# EAGLE board PCB-BI8-2x5C3_V2 (EAGLE 7.1.0)
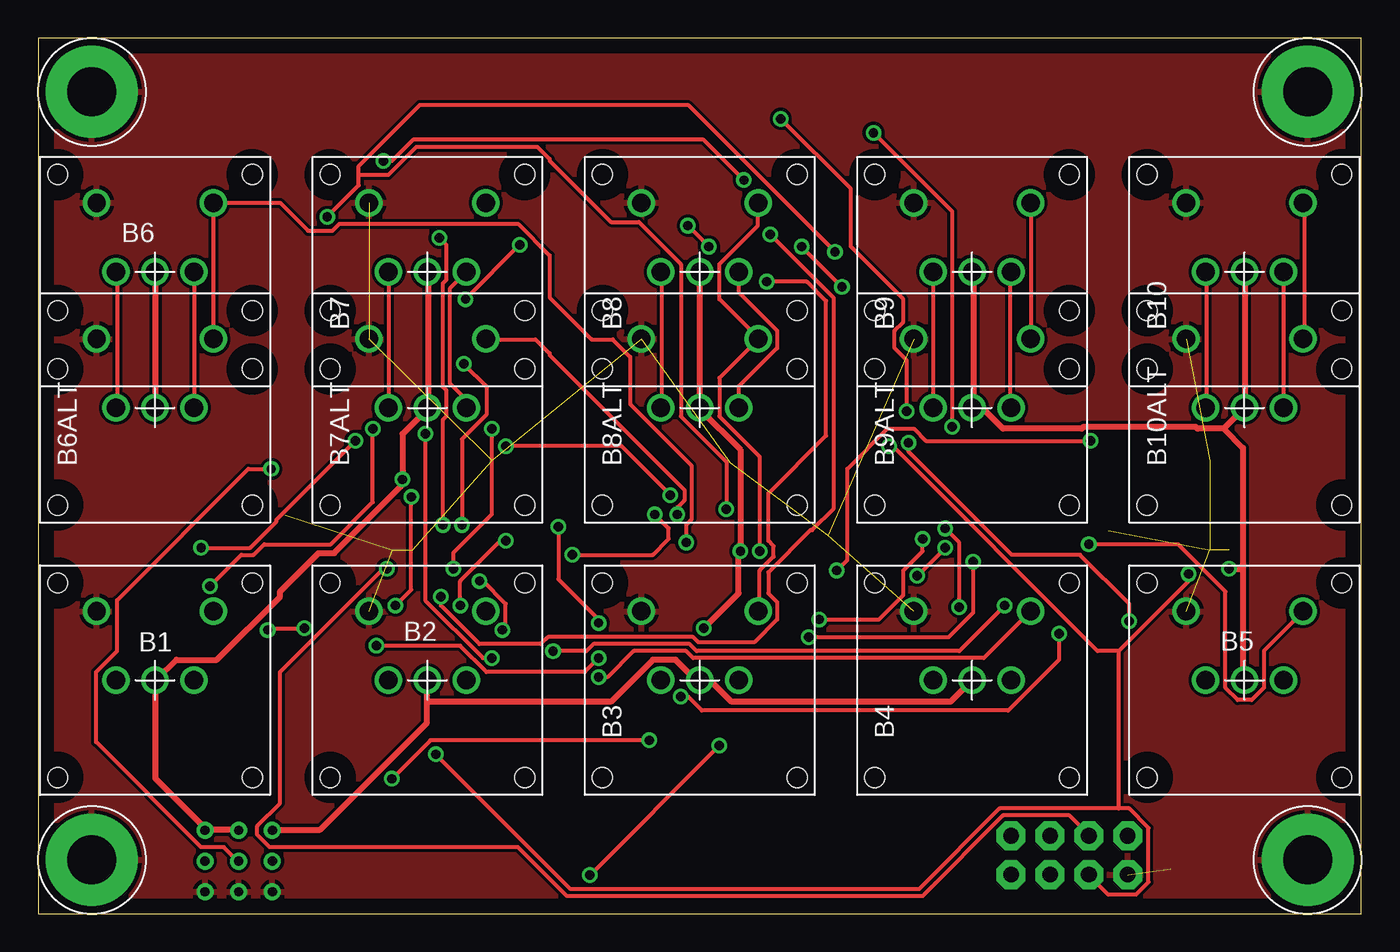
[diagram p0: board, top side]
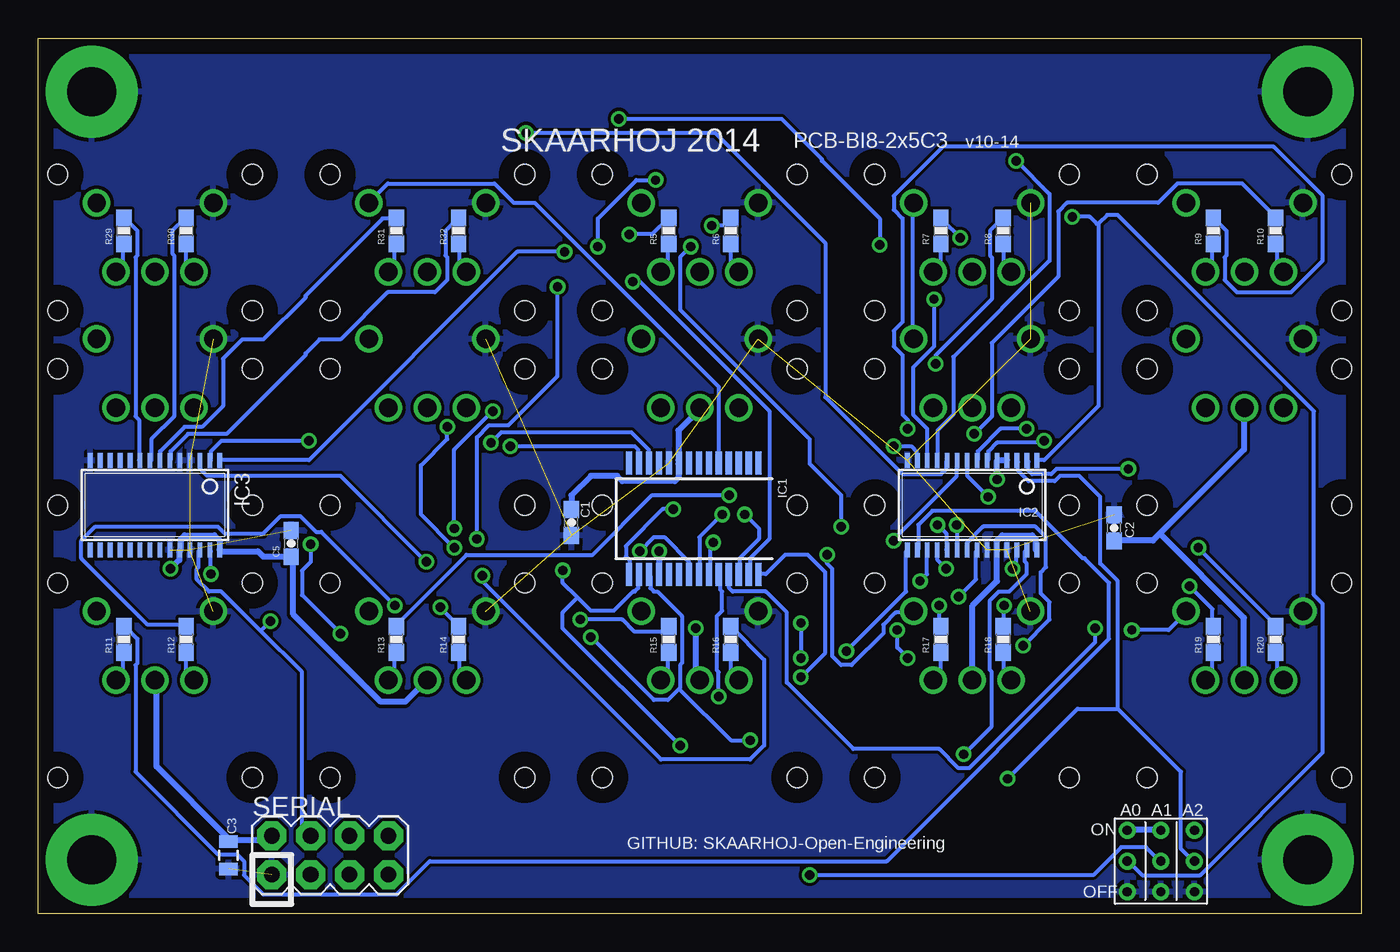
[diagram p1: board, bottom side, seen from below]

Size 86.36 x 57.15 mm. Coordinates in mm from the lower left corner, seen from the top.
Outline: 0,0 86.36,0 86.36,57.15 0,57.15 0,0
Copper layers (1*16): Top 0.035mm / dielectric 1.5mm / Bottom 0.035mm
Design rules "default": minimum track width 10mil, minimum drill 24mil, track to track 8mil, track to pad 8mil, pad to pad 8mil, via to via 8mil, smd to smd 8mil, copper to edge 40mil, drill to drill 8mil, minimum pad ring 10mil, minimum via ring 8mil, stop-mask expansion 4mil, vias tented up to drill 0mil, thermal gap 10mil
Net classes: 0 default: width 0.203 mm, drill 0.406 mm, clearance 0.203 mm; 1 Power: width 0.406 mm, drill 0.61 mm, clearance 0.203 mm

## Footprints (pad centres in the part's own frame; a part is rotated, then mirrored left to right if it is on the bottom)
LP11 = drill 1.2: COM 0,0; P$2 0,2.54; P$3 0,-2.54; P$4 4.5,3.81; P$5 4.5,-3.81 | hole 1.3: -6.35,6.35; 6.35,6.35; 6.35,-6.35; -6.35,-6.35
0603-CAP = smd 1.1 x 1: 1 -0.85,0; 2 0.85,0
0805 = smd 0.8 x 1.2: 1 -0.9,0; 2 0.9,0
SSOP28 = smd 0.4 x 1.5: 1 -4.225,-3.625; 2 -3.575,-3.625; 3 -2.925,-3.625; 4 -2.275,-3.625; 5 -1.625,-3.625; 6 -0.975,-3.625; 7 -0.325,-3.625; 8 0.325,-3.625; 9 0.975,-3.625; 10 1.625,-3.625; 11 2.275,-3.625; 12 2.925,-3.625; 13 3.575,-3.625; 14 4.225,-3.625; 15 4.225,3.625; 16 3.575,3.625; 17 2.925,3.625; 18 2.275,3.625; 19 1.625,3.625; 20 0.975,3.625; 21 0.325,3.625; 22 -0.325,3.625; 23 -0.975,3.625; 24 -1.625,3.625; 25 -2.275,3.625; 26 -2.925,3.625; 27 -3.575,3.625; 28 -4.225,3.625
TSSOP28 = smd 0.305 x 0.991: 1 -4.225,-2.918; 2 -3.575,-2.918; 3 -2.925,-2.918; 4 -2.275,-2.918; 5 -1.625,-2.918; 6 -0.975,-2.918; 7 -0.325,-2.918; 8 0.325,-2.918; 9 0.975,-2.918; 10 1.625,-2.918; 11 2.275,-2.918; 12 2.925,-2.918; 13 3.575,-2.918; 14 4.225,-2.918; 15 4.225,2.918; 16 3.575,2.918; 17 2.925,2.918; 18 2.275,2.918; 19 1.625,2.918; 20 0.975,2.918; 21 0.325,2.918; 22 -0.325,2.918; 23 -0.975,2.918; 24 -1.625,2.918; 25 -2.275,2.918; 26 -2.925,2.918; 27 -3.575,2.918; 28 -4.225,2.918
0603-RES = smd 1.1 x 1: 1 -0.85,0; 2 0.85,0
2X4 = drill 1.016 pad 1.88 octagon: 1 -3.81,-1.27; 2 -3.81,1.27; 3 -1.27,-1.27; 4 -1.27,1.27; 5 1.27,-1.27; 6 1.27,1.27; 7 3.81,-1.27; 8 3.81,1.27
3.2MMPAD6MM = drill 3.2 pad 6: P$1 0,0
3BITADDR = drill 0.6: A0 -2.2,0; A1 0,0; A2 2.2,0; H1 -2.2,2; H2 0,2; H3 2.2,2; L1 -2.2,-2; L2 0,-2; L3 2.2,-2

## Placement (x,y rotation side)
B1  LP11-B"  [LP11]  7.62,15.24 90 top
B2  LP11-B"  [LP11]  25.4,15.24 90 top
B3  LP11-B"  [LP11]  43.18,15.24 90 top
B4  LP11-B"  [LP11]  60.96,15.24 90 top
B5  LP11-B"  [LP11]  78.74,15.24 90 top
B6  LP11-B"  [LP11]  7.62,41.91 90 top
B6ALT  LP11-B"  [LP11]  7.62,33.02 90 top
B7  LP11-B"  [LP11]  25.4,41.91 90 top
B7ALT  LP11-B"  [LP11]  25.4,33.02 90 top
B8  LP11-B"  [LP11]  43.18,41.91 90 top
B8ALT  LP11-B"  [LP11]  43.18,33.02 90 top
B9  LP11-B"  [LP11]  60.96,41.91 90 top
B9ALT  LP11-B"  [LP11]  60.96,33.02 90 top
B10  LP11-B"  [LP11]  78.74,41.91 90 top
B10ALT  LP11-B"  [LP11]  78.74,33.02 90 top
C1  100nF  [0603-CAP]  51.56,25.53 90 bottom
C2  100nF  [0603-CAP]  16.13,25.17 90 bottom
C3  10uF  [0805]  73.94,3.81 270 bottom
C5  100nF  [0603-CAP]  69.85,24.16 90 bottom
IC1  MCP23017SS  [SSOP28]  43.56,25.78 180 bottom
IC2  PCA9685  [TSSOP28]  25.4,26.67 180 bottom
IC3  PCA9685  [TSSOP28]  78.74,26.67 180 bottom
R5  270  [0603-RES]  45.21,44.58 90 bottom
R6  270  [0603-RES]  41.15,44.58 90 bottom
R7  270  [0603-RES]  27.43,44.58 90 bottom
R8  270  [0603-RES]  23.37,44.58 90 bottom
R9  270  [0603-RES]  9.65,44.58 90 bottom
R10  270  [0603-RES]  5.59,44.58 90 bottom
R11  270  [0603-RES]  80.77,17.91 90 bottom
R12  270  [0603-RES]  76.71,17.91 90 bottom
R13  270  [0603-RES]  62.99,17.91 90 bottom
R14  270  [0603-RES]  58.93,17.91 90 bottom
R15  270  [0603-RES]  45.21,17.91 90 bottom
R16  270  [0603-RES]  41.15,17.91 90 bottom
R17  270  [0603-RES]  27.43,17.91 90 bottom
R18  270  [0603-RES]  23.37,17.91 90 bottom
R19  270  [0603-RES]  9.65,17.91 90 bottom
R20  270  [0603-RES]  5.59,17.91 90 bottom
R29  270  [0603-RES]  80.77,44.58 90 bottom
R30  270  [0603-RES]  76.71,44.58 90 bottom
R31  270  [0603-RES]  62.99,44.58 90 bottom
R32  270  [0603-RES]  58.93,44.58 90 bottom
SERIAL  M04X2  [2X4]  67.31,3.81 0 bottom
U$15  GNDPAD6MM  [3.2MMPAD6MM]  3.5,3.5 0 top
U$18  GNDPAD6MM  [3.2MMPAD6MM]  82.86,3.5 0 top
U$19  3BITADDR  [3BITADDR]  13.08,3.43 0 bottom
U$20  GNDPAD6MM  [3.2MMPAD6MM]  3.5,53.65 0 top
U$21  GNDPAD6MM  [3.2MMPAD6MM]  82.86,53.65 0 top

## Library data of the parts
B1-B6 B6ALT B7 B7ALT B8 B8ALT B9 B9ALT B10 B10ALT U$15 U$18-U$21 = SKAARHOJ
C1-C3 C5 R5-R20 R29-R32 SERIAL = SparkFun
IC1 = microchip; MF: MICROCHIP; MPN: MCP23017-E/SS; OC_FARNELL: 1467674; OC_NEWARK: 31K2960
IC2 IC3 = wsmith

## Nets
5V [Power]: B1.COM B2.COM B3.COM B4.COM B5.COM B6.COM B6ALT.COM B7.COM B7ALT.COM B8.COM B8ALT.COM B9.COM B9ALT.COM B10.COM B10ALT.COM C1.2 C2.1 C3.1 C5.1 IC1.9 IC1.18 IC2.4 IC2.5 IC2.24 IC2.28 IC3.24 IC3.28 SERIAL.2 U$19.H1 U$19.H2 U$19.H3
A0: IC1.15 IC2.1 IC3.1 U$19.A0
A1: IC1.16 IC2.2 IC3.2 U$19.A1
A2: IC1.17 IC2.3 IC3.3 U$19.A2
DISP_DATA_OUT: SERIAL.6
GND [Power]: B1.P$4 B2.P$4 B3.P$4 B4.P$4 B5.P$4 B6.P$4 B6ALT.P$4 B7.P$4 B7ALT.P$4 B8.P$4 B8ALT.P$4 B9.P$4 B9ALT.P$4 B10.P$4 B10ALT.P$4 C1.1 C2.2 C3.2 C5.2 IC1.10 IC2.14 IC2.23 IC2.25 IC3.4 IC3.5 IC3.14 IC3.23 IC3.25 SERIAL.1 U$15.P$1 U$18.P$1 U$19.L1 U$19.L2 U$19.L3 U$20.P$1 U$21.P$1
GPA0: B8.P$5 B8ALT.P$5 IC1.21
GPA1: B7.P$5 B7ALT.P$5 IC1.22
GPA2: B6.P$5 B6ALT.P$5 IC1.23
GPA3: B5.P$5 IC1.24
GPA4: B1.P$5 IC1.25
GPA5: B2.P$5 IC1.26
GPA6: B3.P$5 IC1.27
GPA7: B4.P$5 IC1.28
GPA8: IC1.1
GPA9: IC1.2
GPA10: IC1.3
GPA11: IC1.4
GPA12: B9.P$5 B9ALT.P$5 IC1.5
GPA13: B10.P$5 B10ALT.P$5
GPA14: IC1.7
GPA15: IC1.8
I2C_SCL: IC1.12 IC2.26 IC3.26 SERIAL.4
I2C_SDA: IC1.13 IC2.27 IC3.27 SERIAL.3
L0: B1.P$2 R20.1
L1: B1.P$3 R19.1
L2: B2.P$2 R18.1
L3: B2.P$3 R17.1
L4: B3.P$2 R16.1
L5: B3.P$3 R15.1
L6: B4.P$2 R14.1
L7: B4.P$3 R13.1
L8: B5.P$2 R12.1
L9: B5.P$3 R11.1
L10: B6.P$2 B6ALT.P$2 R10.1
L11: B6.P$3 B6ALT.P$3 R9.1
L12: B7.P$2 B7ALT.P$2 R8.1
L13: B7.P$3 B7ALT.P$3 R7.1
L14: B8.P$2 B8ALT.P$2 R6.1
L15: B8.P$3 B8ALT.P$3 R5.1
L16: B9.P$2 B9ALT.P$2 R32.1
L17: B9.P$3 B9ALT.P$3 R31.1
L18: B10.P$2 B10ALT.P$2 R30.1
L19: B10.P$3 B10ALT.P$3 R29.1
N$4: IC2.13 R13.2
N$5: IC2.12 R14.2
N$7: IC2.11 R15.2
N$8: IC3.9 R29.2
N$9: IC2.10 R16.2
N$10: IC2.9 R17.2
N$11: IC2.8 R18.2
N$12: IC2.7 R19.2
N$13: IC3.8 R30.2
N$14: IC3.7 R31.2
N$15: IC3.6 R32.2
N$19: IC2.6 R20.2
N$20: IC2.15 R12.2
N$21: IC2.16 R11.2
N$22: IC2.17 R10.2
N$23: IC2.18 R9.2
N$24: IC2.19 R8.2
N$25: IC2.20 R7.2
N$26: IC2.21 R6.2
N$27: IC2.22 R5.2
SDI_MOSI: SERIAL.8
SDI_SCLK: SERIAL.7
SLIDER_IN: SERIAL.5

## Tracks (layer width: path | path; a pad name or v marks a point on that pad's centre or on a via)
5V  (via drill 0.61)
  Top 0.406: B9.COM 61.04,41.83 61.04,33.03 B9ALT.COM 61.15,32.92 61.72,32.92 62.98,31.66 68.12,31.66 68.24,31.77 75.55,31.77 75.67,31.66 77.38,31.66 | B10.COM 78.75,41.83 78.75,33.03 B10ALT.COM 77.38,31.66 | 78.64,22.52 78.64,30.4 77.38,31.66 | 78.64,22.52 78.64,15.32 B5.COM | B6.COM 7.66,41.83 7.66,33.03 B6ALT.COM | B7.COM 25.49,41.83 25.49,33.15 B7ALT.COM 25.38,32.92 23.77,31.32 v23.77,28.35 23.66,28.23 23.66,27.89 19.32,23.55 18.29,23.55 15.77,21.03 15.77,20.69 11.66,16.57 9.03,16.57 7.77,15.32 B1.COM 7.66,15.2 7.66,8.8 10.86,5.6 U$19.H3 10.97,5.49 13.03,5.49 U$19.H2 | 25.38,13.83 25.38,12.46 18.4,5.49 15.32,5.49 U$19.H1 | 25.38,13.83 25.38,15.2 B2.COM | B8.COM 43.2,41.83 43.2,33.15 B8ALT.COM 43.2,32.92 45.83,30.29 v45.83,23.66 45.72,23.55 45.72,20.92 v43.43,18.63 | B4.COM 59.55,13.83 45.26,13.83 43.89,15.2 43.2,15.2 B3.COM 42.98,15.2 41.6,16.57 40.12,16.57 37.38,13.83 25.38,13.83 | v77.72,22.52 78.64,22.52
  Bottom 0.406: SERIAL.2 71.21,5.03 71.44,4.8 73.84,4.8 C3.1 73.95,4.92 78.64,9.6 78.64,15.2 B5.COM | 13.14,24.8 7.66,30.29 7.66,32.92 B6ALT.COM | 13.14,24.8 13.6,24.35 16.12,24.35 C2.1 | IC2.4 23.2,29.6 23.77,29.6 IC2.5 23.77,29.49 v23.77,28.35 | IC2.28 21.26,23.77 21.26,24.46 21.49,24.69 23.43,24.69 23.77,24.35 23.77,23.77 IC2.24 23.77,23.66 23.77,21.72 25.38,20.12 25.38,15.32 B2.COM | U$19.H1 15.2,5.49 13.14,5.49 U$19.H2 | 13.14,24.8 7.66,19.32 7.66,15.32 B1.COM | C1.2 51.55,26.4 51.55,27.32 50.29,28.57 48.58,28.57 48.23,28.23 44.81,28.23 44.58,28.46 44.58,29.38 IC1.9 44.58,29.6 44.58,31.55 43.2,32.92 B8ALT.COM | v45.83,23.66 45.83,22.17 IC1.18 | B4.COM 61.04,15.2 62.41,13.83 64.01,13.83 69.72,19.55 69.72,23.2 C5.1 69.95,23.32 71.67,23.32 72.01,23.66 74.41,23.66 IC3.28 74.52,23.77 74.52,24.35 74.87,24.69 76.81,24.69 77.04,24.46 77.04,23.77 IC3.24 77.15,23.55 77.15,23.09 v77.72,22.52 | v43.43,18.63 43.43,15.54 43.2,15.32 B3.COM
A0  (via drill 0.61)
  Top 0.254: v52.01,43.2 42.41,52.81 24.92,52.81 20.92,48.81 20.92,48.23 | 20.92,48.23 20.92,47.55 v18.86,45.49 | v44.92,26.4 44.92,29.49 41.95,32.46 41.95,42.41 39.2,45.15 37.38,45.15 33.38,49.15 33.38,49.26 32.58,50.06 24.69,50.06 22.86,48.23 20.92,48.23
  Bottom 0.254: 17.14,45.03 17.14,33.15 20.69,29.6 21.14,29.6 IC2.1 | 17.14,45.03 16.57,45.61 15.89,45.61 3.09,32.8 3.09,20.8 2.52,20.23 2.52,10.52 10.52,2.52 14.29,2.52 15.2,3.43 U$19.A0 | v52.01,43.2 55.09,43.2 68.69,29.6 74.41,29.6 IC3.1 | v18.86,45.49 17.72,45.49 17.26,45.03 17.14,45.03 | v44.92,26.4 45.61,26.4 48.01,24 48.01,23.32 47.78,23.09 47.78,22.17 IC1.15
A1  (via drill 0.61)
  Top 0.254: v68.69,30.86 57.95,30.86 57.15,31.66 55.44,31.66 52.81,29.03 52.81,23.09 v52.12,22.4 | v15.2,29.03 13.72,29.03 5.14,20.46 5.14,17.14 3.77,15.77 3.77,11.2 10.63,4.34 12.12,4.34 13.03,3.43 U$19.A1 | v36.01,2.52 v44.46,10.97
  Bottom 0.254: v68.69,30.86 74.41,30.86 75.09,30.18 75.09,29.6 IC3.2 | v52.12,22.4 52.12,21.6 51.15,20.63 | 51.15,20.63 50.29,19.77 48.81,19.77 47.55,21.03 47.43,21.03 47.21,21.26 47.21,22.06 IC1.16 | v15.2,29.03 19.89,29.03 20.23,28.69 21.49,28.69 21.72,28.92 21.72,29.49 IC2.2 | 51.15,20.63 52.12,19.66 52.12,18.63 v44.46,10.97 | v36.01,2.52 17.49,2.52 15.66,4.34 14.06,4.34 13.14,3.43 U$19.A1
A2  (via drill 0.61)
  Top 0.254: v61.04,22.97 61.04,19.66 59.44,18.06 v50.29,18.06 | v23.09,8.8 25.6,11.32 v39.89,11.32
  Bottom 0.254: 15.89,13.37 15.89,21.72 17.03,22.86 17.03,27.2 18.4,28.57 19.66,28.57 20,28.23 21.72,28.23 22.4,28.92 22.4,29.49 IC2.3 | 15.89,13.37 11.77,9.26 11.77,4.23 10.97,3.43 U$19.A2 | v61.04,22.97 66.64,28.57 75.32,28.57 75.78,29.03 75.78,29.49 IC3.3 | v50.29,18.06 46.18,13.95 45.26,13.95 44.52,14.69 | 44.52,14.69 44.46,14.74 44.46,16.23 44.35,16.34 44.35,19.43 45.95,21.03 46.18,21.03 46.41,21.26 46.41,22.06 IC1.17 | 15.89,13.37 18.52,13.37 v23.09,8.8 | v39.89,11.32 41.15,11.32 44.52,14.69
GND  (17 unrouted)
  pour Top: 0,0 86.36,0 86.36,57.15 0,57.15
  pour Bottom: 0,0 86.36,0 86.36,57.15 0,57.15
GPA0  (via drill 0.61)
  Top 0.254: v47.09,23.66 47.09,29.83 44.46,32.46 44.46,34.98 46.98,37.49 B8ALT.P$5 46.98,37.6 44.46,40.12 44.46,42.41 46.98,44.92 46.98,46.41 B8.P$5
  Bottom 0.254: v47.09,23.66 46.18,24.57 45.49,24.57 43.89,22.97 43.89,22.17 IC1.21
GPA1  (via drill 0.61)
  Top 0.254: v41.72,26.06 41.72,26.52 42.18,26.98 42.18,27.66 33.38,36.46 33.38,36.58 32.46,37.49 29.26,37.49 B7ALT.P$5
  Bottom 0.254: v41.72,26.06 43.2,24.57 43.2,22.17 IC1.22 | B7.P$5 29.26,46.41 29.26,37.6 B7ALT.P$5
GPA2  (via drill 0.61)
  Top 0.254: v42.29,24.23 42.29,25.38 42.63,25.72 42.63,29.26 38.63,33.26 38.63,36.35 37.49,37.49 36.12,37.49 33.38,40.23 33.38,42.98 31.32,45.03 19.66,45.03 19.2,44.58 17.6,44.58 15.77,46.41 B6.P$5 B6ALT.P$5
  Bottom 0.254: v42.29,24.23 42.52,24 42.52,22.17 IC1.23
GPA3  (via drill 0.61)
  Top 0.254: v41.95,14.17 42.41,14.17 43.32,13.26 63.32,13.26 66.64,16.57 v66.64,18.29 | v68.58,24.12 74.41,24.12 77.5,21.03 77.5,14.74 78.3,13.95 79.21,13.95 80.01,14.74 80.01,17.14 82.53,19.66 B5.P$5
  Bottom 0.254: v41.95,14.17 41.95,15.77 42.06,15.89 42.06,19.43 41.72,19.77 41.72,21.03 41.83,21.14 41.83,22.06 IC1.24 | v66.64,18.29 69.15,20.8 69.15,22.4 68.58,22.97 v68.58,24.12
GPA4  (via drill 0.61)
  Top 0.254: v17.37,18.63 15.09,18.63 v14.97,18.52
  Bottom 0.254: v17.37,18.63 17.37,17.72 25.6,9.49 26.29,9.49 27.55,10.74 33.15,10.74 37.49,15.09 37.49,19.66 38.86,21.03 41.03,21.03 41.26,21.26 41.26,22.06 IC1.25 | v14.97,18.52 12.57,18.52 11.43,19.66 B1.P$5
GPA5  (via drill 0.61)
  Top 0.254: v40.23,26.06 41.15,25.15 41.15,24.46 40.12,23.43 v34.86,23.43
  Bottom 0.254: v40.23,26.06 39.32,25.15 39.32,24.46 40.58,23.2 40.58,22.17 IC1.26 | v34.86,23.43 34.86,22.86 34.52,22.52 34.52,16.8 33.95,16.23 33.26,16.23 31.2,18.29 31.2,18.86 30.4,19.66 29.26,19.66 B2.P$5
GPA6  (via drill 0.61)
  Top 0.254: v47.55,41.26 50.18,41.26 51.44,40.01 51.44,31.2 47.66,27.43 47.66,24.35 48.01,24 48.01,23.32 47.09,22.4 47.09,19.77 B3.P$5
  Bottom 0.254: v47.55,41.26 47.09,41.26 38.63,32.8 38.63,24.46 39.89,23.2 39.89,22.17 IC1.27
GPA7  (via drill 0.61)
  Top 0.254: v36.58,15.43 37.15,15.43 38.86,17.14 42.29,17.14 42.75,16.69 61.72,16.69 64.69,19.66 B4.P$5
  Bottom 0.254: v36.58,15.43 34.98,17.03 34.98,22.29 36.12,23.43 37.6,23.43 38.86,22.17 39.32,22.17 IC1.28
GPA12
  Top 0.254: B9ALT.P$5 64.81,37.6 64.81,46.41 B9.P$5
  Bottom 0.254: IC1.5 41.95,29.49 41.95,34.4 53.95,46.41 55.32,46.41 56.58,47.66 63.55,47.66 64.69,46.52 B9.P$5
GPA13
  Top 0.254: B10ALT.P$5 82.64,37.6 82.64,46.41 B10.P$5
I2C_SCL  (via drill 0.61)
  Top 0.254: v22.75,22.52 22.52,22.52 15.77,15.77 15.77,7.2 14.29,5.71 14.29,5.14 15.09,4.34 31.32,4.34 34.52,1.14 57.72,1.14 62.98,6.4 67.32,6.4 68.58,5.14 SERIAL.4 | v56.81,30.75 56.81,30.18 63.55,23.43 68.01,23.43 71.21,20.23 v71.21,19.09
  Bottom 0.254: v22.75,22.52 22.52,22.75 22.52,23.66 IC2.26 | 71.84,18.46 69.15,15.77 69.15,5.71 68.58,5.14 SERIAL.4 | 71.84,18.46 74.41,21.03 75.21,21.03 76.01,21.83 76.01,22.52 75.89,22.63 75.89,23.66 IC3.26 | v56.81,30.75 56.12,31.43 47.66,31.43 46.52,30.29 46.52,29.49 IC1.12 | 71.84,18.46 v71.21,19.09
I2C_SDA  (via drill 0.61)
  Top 0.254: v25.95,10.4 34.75,1.6 57.49,1.6 62.75,6.86 70.52,6.86 | 70.52,6.86 71.21,6.86 72.47,5.6 72.47,2.06 71.67,1.26 69.84,1.26 68.58,2.52 SERIAL.3 | v75.09,22.17 75.09,21.72 70.52,17.14 | 70.52,6.86 70.52,17.14 | v55.55,30.52 55.78,30.52 69.15,17.14 70.52,17.14
  Bottom 0.254: v25.95,10.4 24.12,12.23 24.12,15.77 24.23,15.89 24.23,20.46 23.66,21.03 22.97,21.03 21.83,22.17 21.83,22.86 21.95,22.97 21.95,23.66 21.83,23.77 IC2.27 | v75.09,22.17 75.09,23.66 IC3.27 | v55.55,30.52 47.43,30.52 47.21,30.29 47.21,29.49 IC1.13
L0
  Bottom 0.254: R20.1 5.49,17.03 5.49,15.66 5.14,15.32 B1.P$2
L1
  Bottom 0.254: R19.1 9.72,17.03 9.72,15.66 10.06,15.32 B1.P$3
L2
  Bottom 0.254: R18.1 23.32,17.03 23.32,15.77 22.86,15.32 B2.P$2
L3
  Bottom 0.254: R17.1 27.43,15.77 27.89,15.32 B2.P$3
L4
  Bottom 0.254: R16.1 41.15,15.77 40.69,15.32 B3.P$2
L5
  Bottom 0.254: R15.1 45.26,17.03 45.26,15.77 45.72,15.32 B3.P$3
L6
  Bottom 0.254: R14.1 58.86,17.03 58.86,15.66 58.52,15.32 B4.P$2
L7
  Bottom 0.254: R13.1 63.09,17.03 63.09,15.66 63.44,15.32 B4.P$3
L8
  Bottom 0.254: R12.1 76.69,17.03 76.69,15.77 76.24,15.32 B5.P$2
L9
  Bottom 0.254: R11.1 80.81,17.03 80.81,15.77 81.27,15.32 B5.P$3
L10
  Top 0.254: B6ALT.P$2 5.14,33.03 5.14,41.83 B6.P$2
  Bottom 0.254: R10.1 5.49,43.66 5.49,42.29 5.14,41.95 B6.P$2
L11
  Top 0.254: B6ALT.P$3 10.17,33.03 10.17,41.83 B6.P$3
  Bottom 0.254: R9.1 9.72,43.66 9.72,42.29 10.06,41.95 B6.P$3
L12
  Top 0.254: B7.P$2 B7ALT.P$2
  Bottom 0.254: R8.1 23.32,43.66 23.32,42.41 22.86,41.95 B7.P$2
L13
  Top 0.254: B7ALT.P$3 27.89,33.03 27.89,33.6 26.86,34.63 26.86,40.8 27.89,41.83 B7.P$3
  Bottom 0.254: R7.1 27.43,42.41 27.89,41.95 B7.P$3
L14
  Top 0.254: B8ALT.P$2 40.69,33.03 40.69,41.83 B8.P$2
  Bottom 0.254: R6.1 41.15,42.41 40.69,41.95 B8.P$2
L15
  Top 0.254: B8ALT.P$3 45.72,34.4 48.23,36.92 48.23,38.06 45.72,40.58 B8.P$3
  Bottom 0.254: R5.1 45.26,43.66 45.26,42.41 45.72,41.95 B8.P$3
L16
  Top 0.254: B9ALT.P$2 58.41,33.03 58.41,41.83 B9.P$2
  Bottom 0.254: R32.1 58.86,43.66 58.86,42.29 58.52,41.95 B9.P$2
L17
  Top 0.254: B9ALT.P$3 63.44,33.03 63.44,41.83 B9.P$3
  Bottom 0.254: R31.1 63.09,43.66 63.09,42.29 63.44,41.95 B9.P$3
L18
  Top 0.254: B10ALT.P$2 76.24,33.03 76.24,41.83 B10.P$2
  Bottom 0.254: B10.P$2 76.69,42.41 76.69,43.66 R30.1
L19
  Top 0.254: B10ALT.P$3 81.27,33.03 81.27,41.83 B10.P$3
  Bottom 0.254: R29.1 80.81,43.66 80.81,42.41 81.27,41.95 B10.P$3
N$4  (via drill 0.61)
  Top 0.254: v30.52,30.52 38.06,30.52 v41.26,27.32
  Bottom 0.254: v30.52,30.52 29.38,30.52 29.03,30.18 29.03,29.6 IC2.13 | v41.26,27.32 46.29,27.32 50.18,23.43 58.41,23.43 62.98,18.86 R13.2
N$5  (via drill 0.61)
  Top 0.254: v31.43,43.66 v27.89,40.12 | v48.46,51.89 53.03,47.32 53.03,43.55 56.46,40.12 56.46,38.63 55.89,38.06 55.89,36.92 56.69,36.12 v56.69,32.8 | v59.21,25.15 60.12,24.23 v60.12,20
  Bottom 0.254: v27.89,40.12 27.89,37.03 29.26,35.66 29.26,32.58 28.35,31.66 28.35,29.6 IC2.12 | v31.43,43.66 31.43,45.38 35.2,49.15 35.2,49.26 37.83,51.89 v48.46,51.89 | v56.69,32.8 59.21,30.29 v59.21,25.15 | v60.12,20 58.98,18.86 R14.2
N$7  (via drill 0.61)
  Top 0.254: v22.52,49.15 23.09,49.15 24.46,50.52 43.43,50.52 v46.06,47.89 | v52.46,40.92 v49.84,43.55 | v57.72,24.46 57.72,23.66 56.46,22.4 56.46,20.8 54.86,19.2 v50.98,19.2
  Bottom 0.254: v22.52,49.15 20.34,46.98 20.34,42.63 26.63,36.35 26.63,32.58 27.66,31.55 27.66,29.6 IC2.11 | v46.06,47.89 47.32,47.89 49.84,45.38 v49.84,43.55 | v52.46,40.92 52.46,35.09 55.66,31.89 56.92,31.89 57.72,31.09 v57.72,24.46 | v50.98,19.2 48.23,19.2 47.43,18.4 45.61,18.4 45.26,18.75 R15.2
N$8
  Bottom 0.254: IC3.9 79.78,29.6 79.78,32.23 80.01,32.46 80.01,42.86 79.9,42.98 79.9,44.58 80.7,45.38 R29.2
N$9  (via drill 0.61)
  Top 0.254: v54.52,50.98 59.66,45.83 v59.66,31.77 | v57.38,22.06 v59.21,23.89
  Bottom 0.254: v54.52,50.98 42.18,50.98 34.98,43.78 34.98,33.72 29.95,28.69 27.43,28.69 27.09,29.03 27.09,29.49 IC2.10 | v59.66,31.77 59.66,30.98 61.38,29.26 61.38,26.06 v59.21,23.89 | v57.38,22.06 57.38,21.72 45.72,10.06 39.89,10.06 38.98,10.97 38.98,16.57 41.15,18.75 R16.2
N$10  (via drill 0.61)
  Top 0.254: v30.52,24.35 30.18,24.35 27.55,21.72 v27.55,20.12
  Bottom 0.254: v30.52,24.35 30.52,24.46 26.4,28.57 26.4,29.49 IC2.9 | v27.55,20.12 27.55,18.97 27.43,18.86 R17.2
N$11  (via drill 0.61)
  Top 0.254: v24.35,27.2 24.35,21.14 v23.32,20.12
  Bottom 0.254: v24.35,27.2 25.72,28.57 25.72,29.49 IC2.8 | v23.32,20.12 23.32,18.86 R18.2
N$12  (via drill 0.61)
  Top 0.254: v21.83,31.66 21.83,26.86 19.09,24.12 14.74,24.12 14.06,23.43 13.26,23.43 v11.2,21.37
  Bottom 0.254: v21.83,31.66 23.55,31.66 25.03,30.18 25.03,29.6 IC2.7 | v11.2,21.37 9.72,19.89 9.72,18.86 R19.2
N$13
  Bottom 0.254: IC3.8 78.98,29.6 78.98,30.98 77.5,32.46 77.5,42.98 77.61,43.09 77.61,44.58 76.81,45.38 R30.2
N$14
  Bottom 0.254: IC3.7 78.41,29.6 78.41,30.18 76.81,31.77 75.67,31.77 74.3,33.15 74.3,36.23 73.04,37.49 71.67,37.49 68.92,40.23 68.92,40.35 63.89,45.38 63.09,45.38 R31.2
N$15
  Bottom 0.254: IC3.6 77.72,29.6 77.72,30.18 76.58,31.32 74.07,31.32 68.92,36.46 68.92,36.58 68.01,37.49 66.64,37.49 63.55,40.58 60.47,40.58 59.66,41.38 59.66,42.86 59.78,42.98 59.78,44.58 58.98,45.38 R32.2
N$19  (via drill 0.61)
  Top 0.254: v20.69,30.86 15.54,25.72 15.54,25.6 13.83,23.89 v10.63,23.89
  Bottom 0.254: v20.69,30.86 20.8,30.75 23.77,30.75 24.35,30.18 24.35,29.6 IC2.6 | v10.63,23.89 5.6,18.86 R20.2
N$20  (via drill 0.61)
  Top 0.254: v33.6,17.14 35.78,17.14 36.23,17.6 42.52,17.6 42.98,17.14 60.12,17.14 v63.09,20.12
  Bottom 0.254: v33.6,17.14 29.72,21.03 29.72,23.66 IC2.15 | v63.09,20.12 67.89,24.92 68.24,24.92 69.27,25.95 70.52,25.95 71.67,24.8 74.18,24.8 74.64,25.26 82.64,25.26 83.55,24.35 83.55,23.2 79.21,18.86 76.81,18.86 R12.2
N$21
  Bottom 0.254: IC2.16 28.92,23.77 28.92,25.38 28,26.29 21.26,26.29 18.17,23.2 18.06,23.2 16.46,21.6 16.46,17.95 30.98,3.43 60.81,3.43 62.98,1.26 71.67,1.26 72.92,2.52 72.92,3.43 73.38,3.89 74.64,3.89 80.01,9.26 80.01,16.23 79.9,16.34 79.9,17.95 80.7,18.75 R11.2
N$22  (via drill 0.61)
  Top 0.254: v28.8,21.72 29.03,21.72 30.52,20.23 30.52,18.75 v30.29,18.52 | v29.6,16.69 29.03,16.69 25.26,20.46 v25.26,31.32
  Bottom 0.254: v28.8,21.72 28.35,22.17 28.35,23.66 IC2.17 | v30.29,18.52 30.29,17.37 v29.6,16.69 | v25.26,31.32 24.12,32.46 24.12,37.26 19.77,41.6 19.77,45.83 19.2,46.41 13.26,46.41 12,47.66 7.77,47.66 5.6,45.49 R10.2
N$23  (via drill 0.61)
  Top 0.254: v27.09,22.52 27.09,23.55 29.6,26.06 v29.6,31.66
  Bottom 0.254: v27.09,22.52 27.66,23.09 27.66,23.66 IC2.18 | v29.6,31.66 29.6,32.23 29.95,32.58 29.95,36.46 30.52,37.03 30.52,38.06 29.95,38.63 29.95,45.38 30.52,45.95 30.52,46.86 27.32,50.06 5.71,50.06 2.52,46.86 2.52,42.63 4.57,40.58 8.12,40.58 8.91,41.38 8.91,42.86 8.8,42.98 8.8,44.58 9.6,45.38 R9.2
N$24  (via drill 0.61)
  Top 0.254: v27.66,25.38 27.66,30.98 29.26,32.58 29.26,34.4 v27.77,35.89
  Bottom 0.254: v27.66,25.38 27.09,24.8 27.09,23.77 IC2.19 | v27.77,35.89 27.77,36.46 24.12,40.12 24.12,42.86 24.23,42.98 24.23,44.58 23.43,45.38 R8.2
N$25  (via drill 0.61)
  Top 0.254: v26.4,25.38 26.4,32.23 26.63,32.46 26.63,34.18 26.4,34.4 26.4,41.15 26.63,41.38 26.63,43.66 v26.18,44.12
  Bottom 0.254: v26.4,25.38 26.4,23.77 IC2.20 | v26.18,44.12 27.43,45.38 R7.2
N$26  (via drill 0.61)
  Top 0.254: v22.06,17.49 27.55,17.49 29.26,15.77 35.66,15.77 v36.58,16.69 | v36.58,18.97 36.58,19.2 33.95,21.83 v33.95,25.26 | v42.41,44.92 v43.78,43.55
  Bottom 0.254: v22.06,17.49 20.34,19.2 20.34,20.34 20.92,20.92 20.92,22.29 20.57,22.63 20.57,24.57 21.26,25.26 24.69,25.26 25.72,24.23 25.72,23.77 IC2.21 | v36.58,18.97 v36.58,16.69 | v33.95,25.26 33.95,27.32 36.01,29.38 36.01,30.98 44.46,39.43 44.46,42.86 v43.78,43.55 | v42.41,44.92 41.6,44.92 41.15,45.38 R6.2
N$27  (via drill 0.61)
  Top 0.254: v26.29,20.69 26.29,20.12 28.8,17.6 32.8,17.6 33.26,18.06 42.75,18.06 43.09,17.72 46.75,17.72 48.23,19.2 48.23,20.34 47.66,20.92 47.66,22.29 50.41,25.03 50.52,25.03 51.89,26.4 51.89,40.23 v47.78,44.35
  Bottom 0.254: v26.29,20.69 25.15,21.83 25.15,23.66 IC2.22 | v47.78,44.35 46.29,44.35 45.26,45.38 R5.2

## Text on the board
_bsilk: v10-14 | PCB-BI8-2x5C3 | SKAARHOJ 2014 | GITHUB: SKAARHOJ-Open-Engineering